# Altium PCB PCB1.PcbDoc
Units mm, origin at the board's own origin, x right, y up, seen from the top; angles counter-clockwise.
Board outline 150.24 x 60.25 mm, 2 copper layers (Top Layer, Bottom Layer); 15 components, 37 nets, 101 pads, 0 vias.
Unrouted connection lines stored in the file: 1.
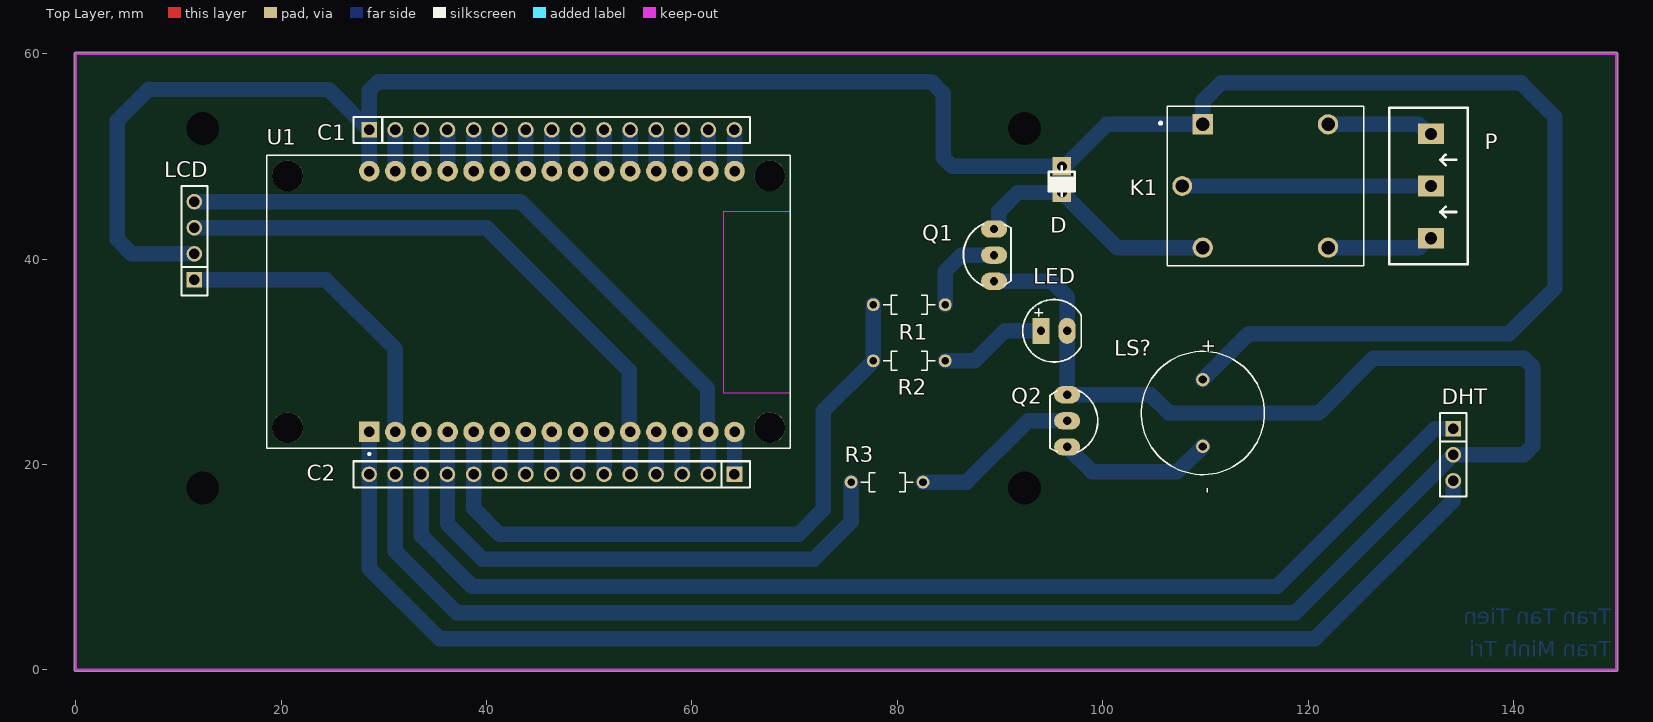
[diagram p0: Top Layer view]
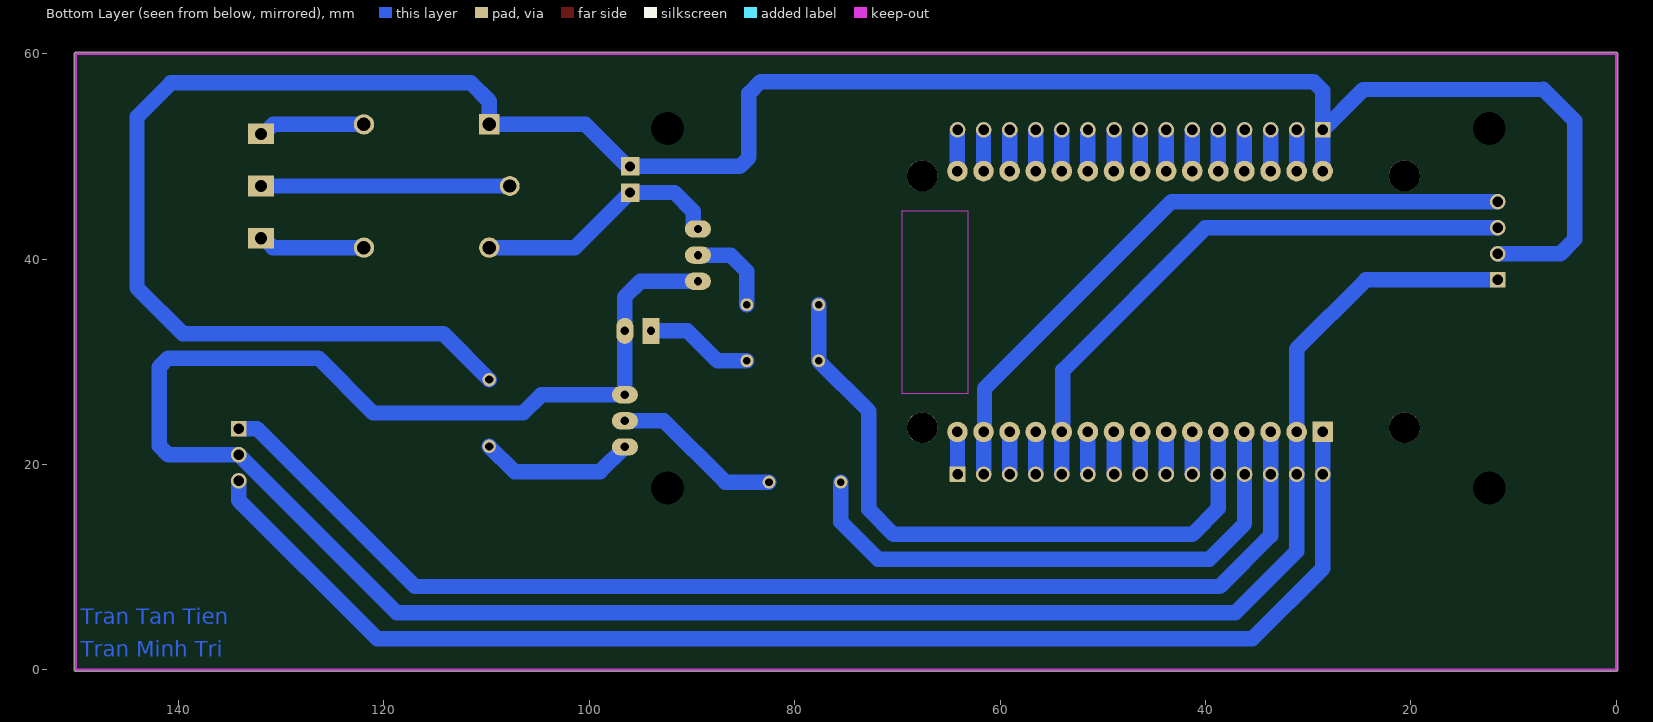
[diagram p1: Bottom Layer view, seen from below]
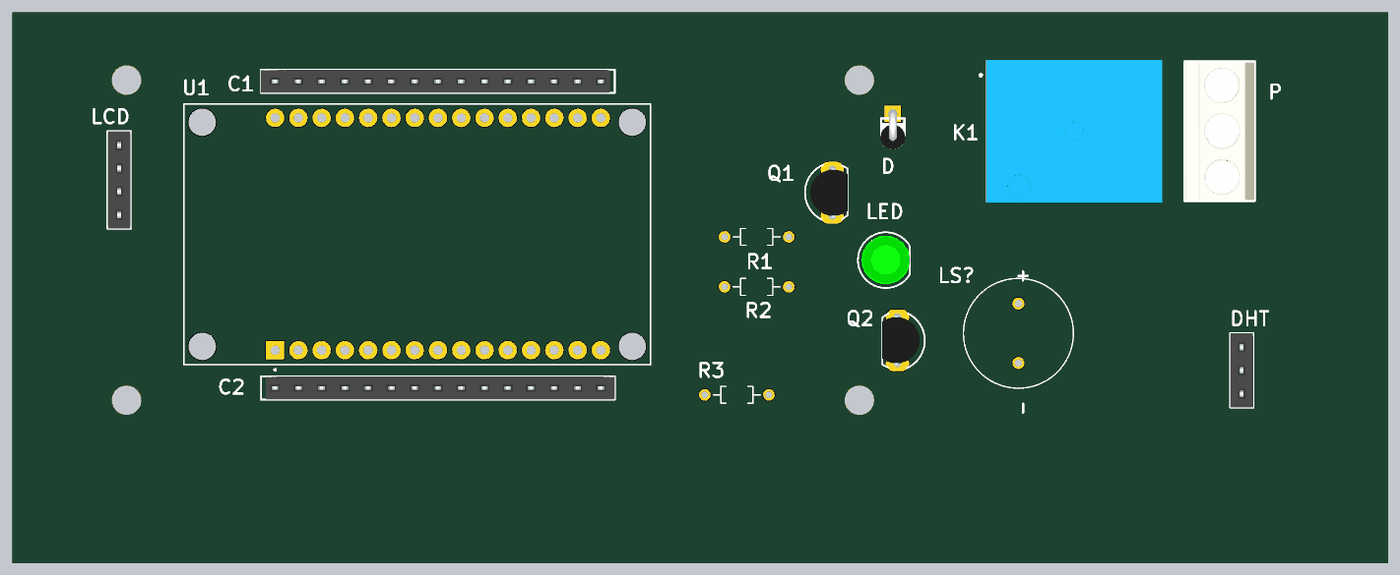
[diagram p2: 3D render of the assembled board from above, using the file's embedded part models]

## Layer stack, top to bottom
Top Solder: solder mask 0.0102, Solder Resist, Dk 3.5
Top Layer: signal copper 0.0356
Dielectric 1: dielectric 0.32, FR-4, Dk 4.8
Bottom Layer: signal copper 0.0356
Bottom Solder: solder mask 0.0102, Solder Resist, Dk 3.5

## Board outline
0,-0.127 cw(c0,0) -0.127,0 -0.127,60 cw(c0,60) 0,60.127 149.987,60.127 cw(c149.987,60) 150.114,60 150.114,0 cw(c149.987,0) 149.987,-0.127

## Design rules (kind name [scope] priority, off if disabled: settings)
Clearance [All] p1: gap=0.254 ignorepadtopadclearanceinfootprint=FALSE except(0: Arc-Hole Track-Hole SMDPad-Hole THPad-Hole Via-Hole Fill-Hole Poly-Hole Region-Hole Text-Hole)
PolygonConnect [All] p1: connectstyle=Relief reliefconductorwidth=0.254 reliefentries=4 polygonreliefangle="90 Angle" airgapwidth=0.254
RoutingVias [All] p1: holewidth=0.711 width=1.27 viastyle="Through Hole" minholewidth=0.711 minwidth=1.27 maxholewidth=0.711 maxwidth=1.27
SolderMaskExpansion [All] p1: expansion=0.102 istentingtop=FALSE
Width [All] p1: maxlimit=2 minlimit=0.254 preferedwidth=1.5 toplayer_maxwidth=0.254 toplayer_prefwidth=0.254 bottomlayer_minwidth=1.5 minimp=50.000000 maximp=50.000000 favimp=50.000000
30 further rules are at their usual default settings.

## Components (designator, comment, footprint, x,y, rotation, side; value= is the part's Value field where it differs from the comment)
C1 "JP15" JP15-C1T 28.575,52.578 r0 top
C2 "JP15" JP15-C1T 64.135,19.05 r180 top
D "" "DIODE 1A" 96.012,49.022 r270 top
DHT "DHT" "JP 1x3 CT" 134.112,23.495 r270 top
K1 "SRD-05VDC-SL-C" RELAY_SRD-05VDC-SL-C 115.824,47.117 r0 top
LCD "JP 1x4 2.54" "JP 1x4 CT" 11.557,37.973 r90 top
LED "LED5" "LED-5 GRe" 93.98,33.02 r0 top
LS? "CCG-1206" CUI_CCG-1206 109.728,25.019 r270 top
P "Header 3 - M" "Medium - Header 3" 131.953,42.037 r90 top
Q1 "2N222" TO92-123 89.408,40.386 r90 top value=C1815
Q2 "2N222" TO92-123 96.52,24.257 r270 top value=C1815
R1 "2-1623927-3" RESAD700W45L350D185 81.153,35.56 r0 top
R2 "2-1623927-3" RESAD700W45L350D185 81.153,30.099 r0 top
R3 "2-1623927-3" RESAD700W45L350D185 78.994,18.288 r0 top
U1 "ESP32-DEVKIT-V1" MODULE_ESP32_DEVKIT_V1 44.1,35.872 r90 top

## Footprints (in the part's own frame and the unit in brackets; to place one, negate y for a bottom-side part, rotate by r counter-clockwise, add the part's x,y. Pads: shape width x height; smd on the part's side, far side on the other; paste and mask are expansions set on the pad)
CUI_CCG-1206 [mm]
  round 1.308 hole 0.8: M(3.25,0) P(-3.25,0)
  silkscreen extent -6,-6 6,6
"DIODE 1A" [mm]
  rect 1.8x1.8 hole 1: 1(0,0) 2(2.54,0)
  silkscreen extent 0,-1.27 2.92,1.27, body extent -0.43,-1.37 3.91,1.36, height 10.64
JP15-C1T [mm] "15 row, straight, gold plating"
  rect 1.52x1.52 hole 1.02: 1(0,0)
  round 1.52 hole 1.02: 2(2.54,0) 3(5.08,0) 4(7.62,0) 5(10.16,0) 6(12.7,0) 7(15.24,0) 8(17.78,0) 9(20.32,0) 10(22.86,0) 11(25.4,0) 12(27.94,0) 13(30.48,0) 14(33.02,0) 15(35.56,0)
  silkscreen extent -1.52,-1.27 37.08,1.27, body extent -1.52,-1.25 36.58,1.25, height 8.51
"JP 1x3 CT" [mm]
  rect 1.52x1.52 hole 1.02: 1(0,0)
  round 1.52 hole 1.02: 2(2.54,0) 3(5.08,0)
  silkscreen extent -1.52,-1.27 6.6,1.27, body extent -1.52,-1.25 6.6,1.25, height 8.51
"JP 1x4 CT" [mm]
  rect 1.52x1.52 hole 1.02: 1(0,0)
  round 1.52 hole 1.02: 2(2.54,0) 3(5.08,0) 4(7.62,0)
  silkscreen extent -1.52,-1.27 9.14,1.27, body extent -1.52,-1.25 9.14,1.25, height 8.51
"LED-5 GRe" [mil] "LED 2 PIN, 5 ly , Only colour,pin to pin 100mil"
  rect 65x100 hole 32: 1(0,0)
  oval 65x100 hole 32: 2(100,0)
  silkscreen extent -70,-120 154,120, body extent -54,-104 154,105, height 337
"Medium - Header 3" [mm]
  rect 2x2.5 hole 1.2: 1(0,0) 2(5.08,0) 3(10.147,0)
  silkscreen extent -2.54,-3.58 12.7,4.06, body extent -2.42,-3.51 12.58,3.99, height 10
MODULE_ESP32_DEVKIT_V1 [mm]
  rect 2x2 / inner round 2 / far side rect 2x2 hole 1.02: 1(-12.7,15.515)
  round 2 hole 1.02: 2(-12.7,12.975) 3(-12.7,10.435) 4(-12.7,7.895) 5(-12.7,5.355) 6(-12.7,2.815) 7(-12.7,0.275) 8(-12.7,-2.265) 9(-12.7,-4.805) 10(-12.7,-7.345) 11(-12.7,-9.885) 12(-12.7,-12.425) 13(-12.7,-14.965) 14(-12.7,-17.505) 15(-12.7,-20.045) 16(12.7,-20.045) 17(12.7,-17.505) 18(12.7,-14.965) 19(12.7,-12.425) 20(12.7,-9.885) 21(12.7,-7.345) 22(12.7,-4.805) 23(12.7,-2.265) 24(12.7,0.275) 25(12.7,2.815) 26(12.7,5.355) 27(12.7,7.895) 28(12.7,10.435) 29(12.7,12.975) 30(12.7,15.515)
  round 3 hole 3 unplated: ""(-12.28,23.475) ""(-12.28,-23.475) ""(12.23,23.475) ""(12.23,-23.475)
  Keep-Out Layer region: 8.78,-25.475 -8.91,-25.475 -8.91,-18.985 8.78,-18.985
  Keep-Out Layer region: 8.78,-25.475 -8.91,-25.475 -8.91,-18.985 8.78,-18.985
  silkscreen extent -14.95,-25.48 14.23,25.48
RELAY_SRD-05VDC-SL-C [mm]
  rect 1.98x1.98 / inner round 1.98 / far side rect 1.98x1.98 hole 1.32: A1(-6.1,6)
  round 1.98 hole 1.32: A2(-6.1,-6) NC(6.1,6) NO(6.1,-6)
  round 1.935 hole 1.29: COM(-8.1,0)
  silkscreen extent -10.3,-7.75 9.55,7.75, body extent -9.6,-7.8 9.6,7.8, height 15.8
RESAD700W45L350D185 [mm]
  round 1.258 hole 0.75: 1(-3.5,0) 2(3.5,0)
  silkscreen extent -2.55,-0.93 2.55,0.93
TO92-123 [mil] "TO-92"
  oval 66x100 hole 32: 1(-100,0) 2(0,0) 3(100,0)
  silkscreen extent -117,-65 120,118, body extent -109,-66 109,95, height 245

## Part data
C1 C2: "WR-PHD 2.54 mm Angled Socket Header", Manufacturer="W¨¹rth Elektronik eiSos GmbH", partNo=613015143121, ComponentLink1 Description=Manufacturer, ComponentLink1URL=http://www.we-online.com, ComponentLink2 Description=Datasheet, ComponentLink2URL=http://katalog.we-online.de/em/datasheet/6130xx143121.pdf, Created by="Karrer Zheng", Created Date="29 March 2013", NoPins=15
D: library part "Diode 1N4007", "Cắm", Chung_Loai=Cắm, Don_Vi=Con, Ma_Hang=MH001063, Ten_Linh_Kien="Diode 1N4007 1A (DIP)"
DHT: library part "JP 1x3 2.54 Cai Thang", "Cắm", Chung_Loai=Cắm, Don_Vi=Con, Ma_Hang=MH004006, Ten_Linh_Kien="Jump Đơn Cái 2.54MM 1x20P Thẳng"
K1: "5V Trigger Relay Module For Arduino And Raspberry Pi 5V Trigger Relay Module For Arduino And Raspberry Pi", Package="NON STANDARD-5 Songle Relay", Availability="Not in stock", Check_prices=https://www.snapeda.com/parts/SRD-05VDC-SL-C/Songle+Relay/view-part/?ref=eda, MF="Songle Relay", MP=SRD-05VDC-SL-C, Price=None, SnapEDA_Link=https://www.snapeda.com/parts/SRD-05VDC-SL-C/Songle+Relay/view-part/?ref=snap
LCD: library part "JP 1x4 2.54 Cai Thang", "Cắm", Chung_Loai=Cắm, Don_Vi=Con, Ma_Hang=MH004006, Ten_Linh_Kien="Jump Đơn Cái 2.54MM 1x20P Thẳng"
LED: library part "LED 5mm", "LED 5mm"
LS?: "12 mm, 5 V, 85 dB, Through Hole, Sealed, Magnetic Audio Transducer Buzzer", Package=None, Availability=Unavailable, MP=CCG-1206, Price=None
P: "Header, 3-Pin, Medium", LatestRevisionDate=17-Jul-2002, LatestRevisionNote="Re-released for DXP Platform.", Publisher="Altium Limited"
Q1 Q2: "NPN 600mW, ECB"
R1 R2 R3: "Carbon Film Resistors - Through Hole 1K Ohm 5% 1/4W Res Carbon Film", Package=None, Power_Rating=".25 W", Resistance=1K, Tolerance=5%, Voltage_Rating="200 V", Availability="In Stock", Check_prices=https://www.snapeda.com/parts/2-1623927-3/TE+Connectivity/view-part/?ref=eda, EU_RoHS_Compliance=Compliant, MF="TE Connectivity", MP=2-1623927-3, Price=None, Purchase-URL=https://pricing.snapeda.com/search/part/2-1623927-3/?ref=eda, SnapEDA_Link=https://www.snapeda.com/parts/2-1623927-3/TE+Connectivity/view-part/?ref=snap
U1: "Dual core, Wi-Fi: 2.4 GHz up to 150 Mbits/s,BLE (Bluetooth Low Energy) and legacy Bluetooth, 32 bits, Up to 240 MHz", Package=None, Availability="Not in stock", Check_prices=https://www.snapeda.com/parts/ESP32-DEVKIT-V1/Do+it/view-part/?ref=eda, MF="Do it", MP=ESP32-DEVKIT-V1, Price=None, SnapEDA_Link=https://www.snapeda.com/parts/ESP32-DEVKIT-V1/Do+it/view-part/?ref=snap

## Free pads (board coordinates)
  round 1.524 hole 3.2: 2(12.366,17.7) 3(12.366,52.7) 6(92.366,17.7) 7(92.366,52.7)

## Nets (pads, with @x,y where several pads share a name; then routed paths per layer and width w, separated by ;. In a path a pad name is that pad's centre, name@x,y a point inside that pad or via, vN(x,y) a via of type N, cw(c..) or ccw(c..) an arc to the next point about the centre after c; other vN are vias at no path point)
3.3V: C2.15 DHT.3 U1.1 | length 129.1
  Bottom Layer w1.5: U1.1 28.579,23.166 28.579,19.054 C2.15 28.575,9.906 35.433,3.048 120.65,3.048 134.112,16.51 DHT.3
D2: C2.12 R3.1 U1.4 | length 55
  Bottom Layer w1.5: U1.4 36.199,23.166 36.199,19.054 C2.12 36.195,14.224 39.624,10.795 71.882,10.795 75.494,14.407 R3.1
D4: C2.11 R1.1 R2.1 U1.5 | length 65.5
  Bottom Layer w1.5: U1.5 38.739,23.166 38.739,19.054 C2.11 38.735,15.748 41.275,13.208 70.358,13.208 72.771,15.621 72.771,25.217 R2.1 R1.1
D5: C2.8 U1.8 | length 4.1
  Bottom Layer w1.5: C2.8 46.359,19.054 46.359,23.166 U1.8
D12: C1.4 U1.27 | length 4
  Bottom Layer w1.5: C1.4 36.195,52.573 36.204,52.563 U1.27
D13: C1.3 U1.28 | length 4
  Bottom Layer w1.5: C1.3 33.659,52.574 33.659,48.577 U1.28
D14: C1.5 U1.26 | length 4
  Bottom Layer w1.5: C1.5 38.735,52.573 38.744,52.563 U1.26
D15: C2.13 DHT.1 U1.3 | length 119
  Bottom Layer w1.5: U1.3 33.659,23.166 33.659,19.054 C2.13 33.655,13.081 38.608,8.128 116.967,8.128 132.334,23.495 DHT.1
D18: C2.7 U1.9 | length 4.1
  Bottom Layer w1.5: C2.7 48.899,19.054 48.899,23.166 U1.9
D19: C2.6 U1.10 | length 4.1
  Bottom Layer w1.5: C2.6 51.439,19.054 51.439,23.166 U1.10
D23: C2.1 U1.15 | length 4.1
  Bottom Layer w1.5: C2.1 64.14,19.055 64.14,23.167 U1.15
D25: C1.8 U1.23 | length 4
  Bottom Layer w1.5: C1.8 46.355,52.573 46.364,52.563 U1.23
D26: C1.7 U1.24 | length 4
  Bottom Layer w1.5: C1.7 43.815,52.573 43.824,52.563 U1.24
D27: C1.6 U1.25 | length 4
  Bottom Layer w1.5: C1.6 41.284,52.587 U1.25
D32: C1.10 U1.21 | length 4
  Bottom Layer w1.5: C1.10 51.435,52.573 51.444,52.563 U1.21
D33: C1.9 U1.22 | length 4
  Bottom Layer w1.5: C1.9 48.895,52.573 48.904,52.563 U1.22
D34: C1.12 U1.19 | length 4
  Bottom Layer w1.5: C1.12 56.515,52.573 56.524,52.563 U1.19
D35: C1.11 U1.20 | length 4
  Bottom Layer w1.5: C1.11 53.975,52.573 53.984,52.563 U1.20
EN: C1.15 U1.16 | length 4
  Bottom Layer w1.5: C1.15 64.135,52.573 64.144,52.563 U1.16
GND: C1.2 C2.14 DHT.2 LCD.1 LED.2 Q1.1 Q2.1 U1.2 U1.29 | length 239.6
  Bottom Layer w1.5: LCD.1 24.384,37.973 31.124,31.233 U1.2 31.124,19.922 31.119,19.916 31.119,19.054 C2.14 31.115,11.557 37.084,5.588 118.745,5.588 DHT.2@134.108,20.951 ; C1.2 31.119,52.574 31.119,48.577 U1.29 ; Q1.1 94.996,37.846 96.549,36.293 96.549,33.049 LED.2 Q2.1 104.648,26.797 106.426,25.019 121.031,25.019 126.365,30.353 140.98,30.353 141.859,29.474 141.859,21.834 140.98,20.955 DHT.2
NetD_2: D.2 K1.A2 Q1.3 | length 25
  Bottom Layer w1.5: Q1.3 89.792,42.926 89.874,43.007 89.874,44.662 91.694,46.482 D.2 101.377,41.117 K1.A2
NetK1_COM: K1.COM P.2 | length 24.2
  Bottom Layer w1.5: K1.COM P.2
NetK1_NC: K1.NC P.3 | length 10.4
  Bottom Layer w1.5: K1.NC 130.77,53.117 131.703,52.184 P.3
NetK1_NO: K1.NO P.1 | length 10.4
  Bottom Layer w1.5: K1.NO 130.783,41.117 131.703,42.037 P.1
NetLED_1: LED.1 R2.2 | length 10.5
  Bottom Layer w1.5: R2.2 87.503,30.099 90.424,33.02 LED.1
NetLS?_M: LS?.M Q2.3 | length 15.2
  Bottom Layer w1.5: Q2.3 98.933,19.304 107.263,19.304 LS?.M
NetQ1_2: Q1.2 R1.2 | length 8.7
  Bottom Layer w1.5: R1.2 84.653,38.806 86.233,40.386 Q1.2
NetQ2_2: Q2.2 R3.2 | length 16.5
  Bottom Layer w1.5: R3.2 86.741,18.288 92.71,24.257 Q2.2
RX0: C2.4 U1.12 | length 4.1
  Bottom Layer w1.5: C2.4 56.519,19.054 56.519,23.166 U1.12
RX2: C2.10 U1.6 | length 4.1
  Bottom Layer w1.5: C2.10 41.279,19.054 41.279,23.166 U1.6
SCL: C2.2 LCD.4 U1.14 | length 65.9
  Bottom Layer w1.5: LCD.4 43.307,45.593 61.509,27.391 61.509,23.267 U1.14 61.599,23.166 61.599,19.054 C2.2
SDA: C2.5 LCD.3 U1.11 | length 58.2
  Bottom Layer w1.5: LCD.3 40.005,43.053 53.889,29.169 53.889,23.267 U1.11 53.979,23.166 53.979,19.054 C2.5
TX0: C2.3 U1.13 | length 4.1
  Bottom Layer w1.5: C2.3 59.059,19.054 59.059,23.166 U1.13
TX2: C2.9 U1.7 | length 4.1
  Bottom Layer w1.5: C2.9 43.819,19.054 43.819,23.166 U1.7
VCC: C1.1 D.1 K1.A1 LCD.2 LS?.P U1.30 | length 238.5
  Bottom Layer w1.5: LCD.2 5.461,40.513 4.064,41.91 4.064,53.494 7.098,56.529 7.112,56.515 24.638,56.515 C1.1 ; U1.30 28.58,48.576 28.58,52.573 C1.1 ; LS?.P 114.194,32.735 139.552,32.735 144.018,37.201 144.018,53.848 140.716,57.15 111.506,57.15 109.724,55.368 K1.A1 100.361,53.117 96.416,49.172 96.162,49.172 D.1 85.334,49.022 84.455,49.901 84.455,56.134 83.312,57.277 29.464,57.277 28.575,56.388 C1.1
VN: C1.13 U1.18 | length 4
  Bottom Layer w1.5: C1.13 59.055,52.573 59.064,52.563 U1.18
VP: C1.14 U1.17 | length 4
  Bottom Layer w1.5: C1.14 61.595,52.573 61.604,52.563 U1.17
pads on no net: U1.

## Keep-outs
Keep-Out Layer:
  lines w0.254: 0,0 0,60 149.987,60 149.987,0 0,0

## Other copper
Bottom Layer:
  text "Tran Tan Tien" at 149.479,4.445 h1.52
  text "Tran Minh Tri" at 149.479,1.27 h1.52

## Text inside footprints (layer, text, board x,y; h text height)
LS?: Top Overlay "-" at 109.728,17.794 h1.27 r270; Top Overlay "+" at 109.728,32.249 h1.28 r270